# Altium PCB EMG_MainBoard_Layout.PcbDoc (part 6 of 6)
Units mm, origin at the board's own origin, x right, y up, seen from the top; angles counter-clockwise.
Board outline 80 x 45 mm, 4 copper layers (L1 TOP, L2 GND, L3 POWER SIGNAL, L4 BOTTOM GND), stack 1.164 mm thick; 231 components, 136 nets, 808 pads, 288 vias.
Unrouted connection lines stored in the file: 570.
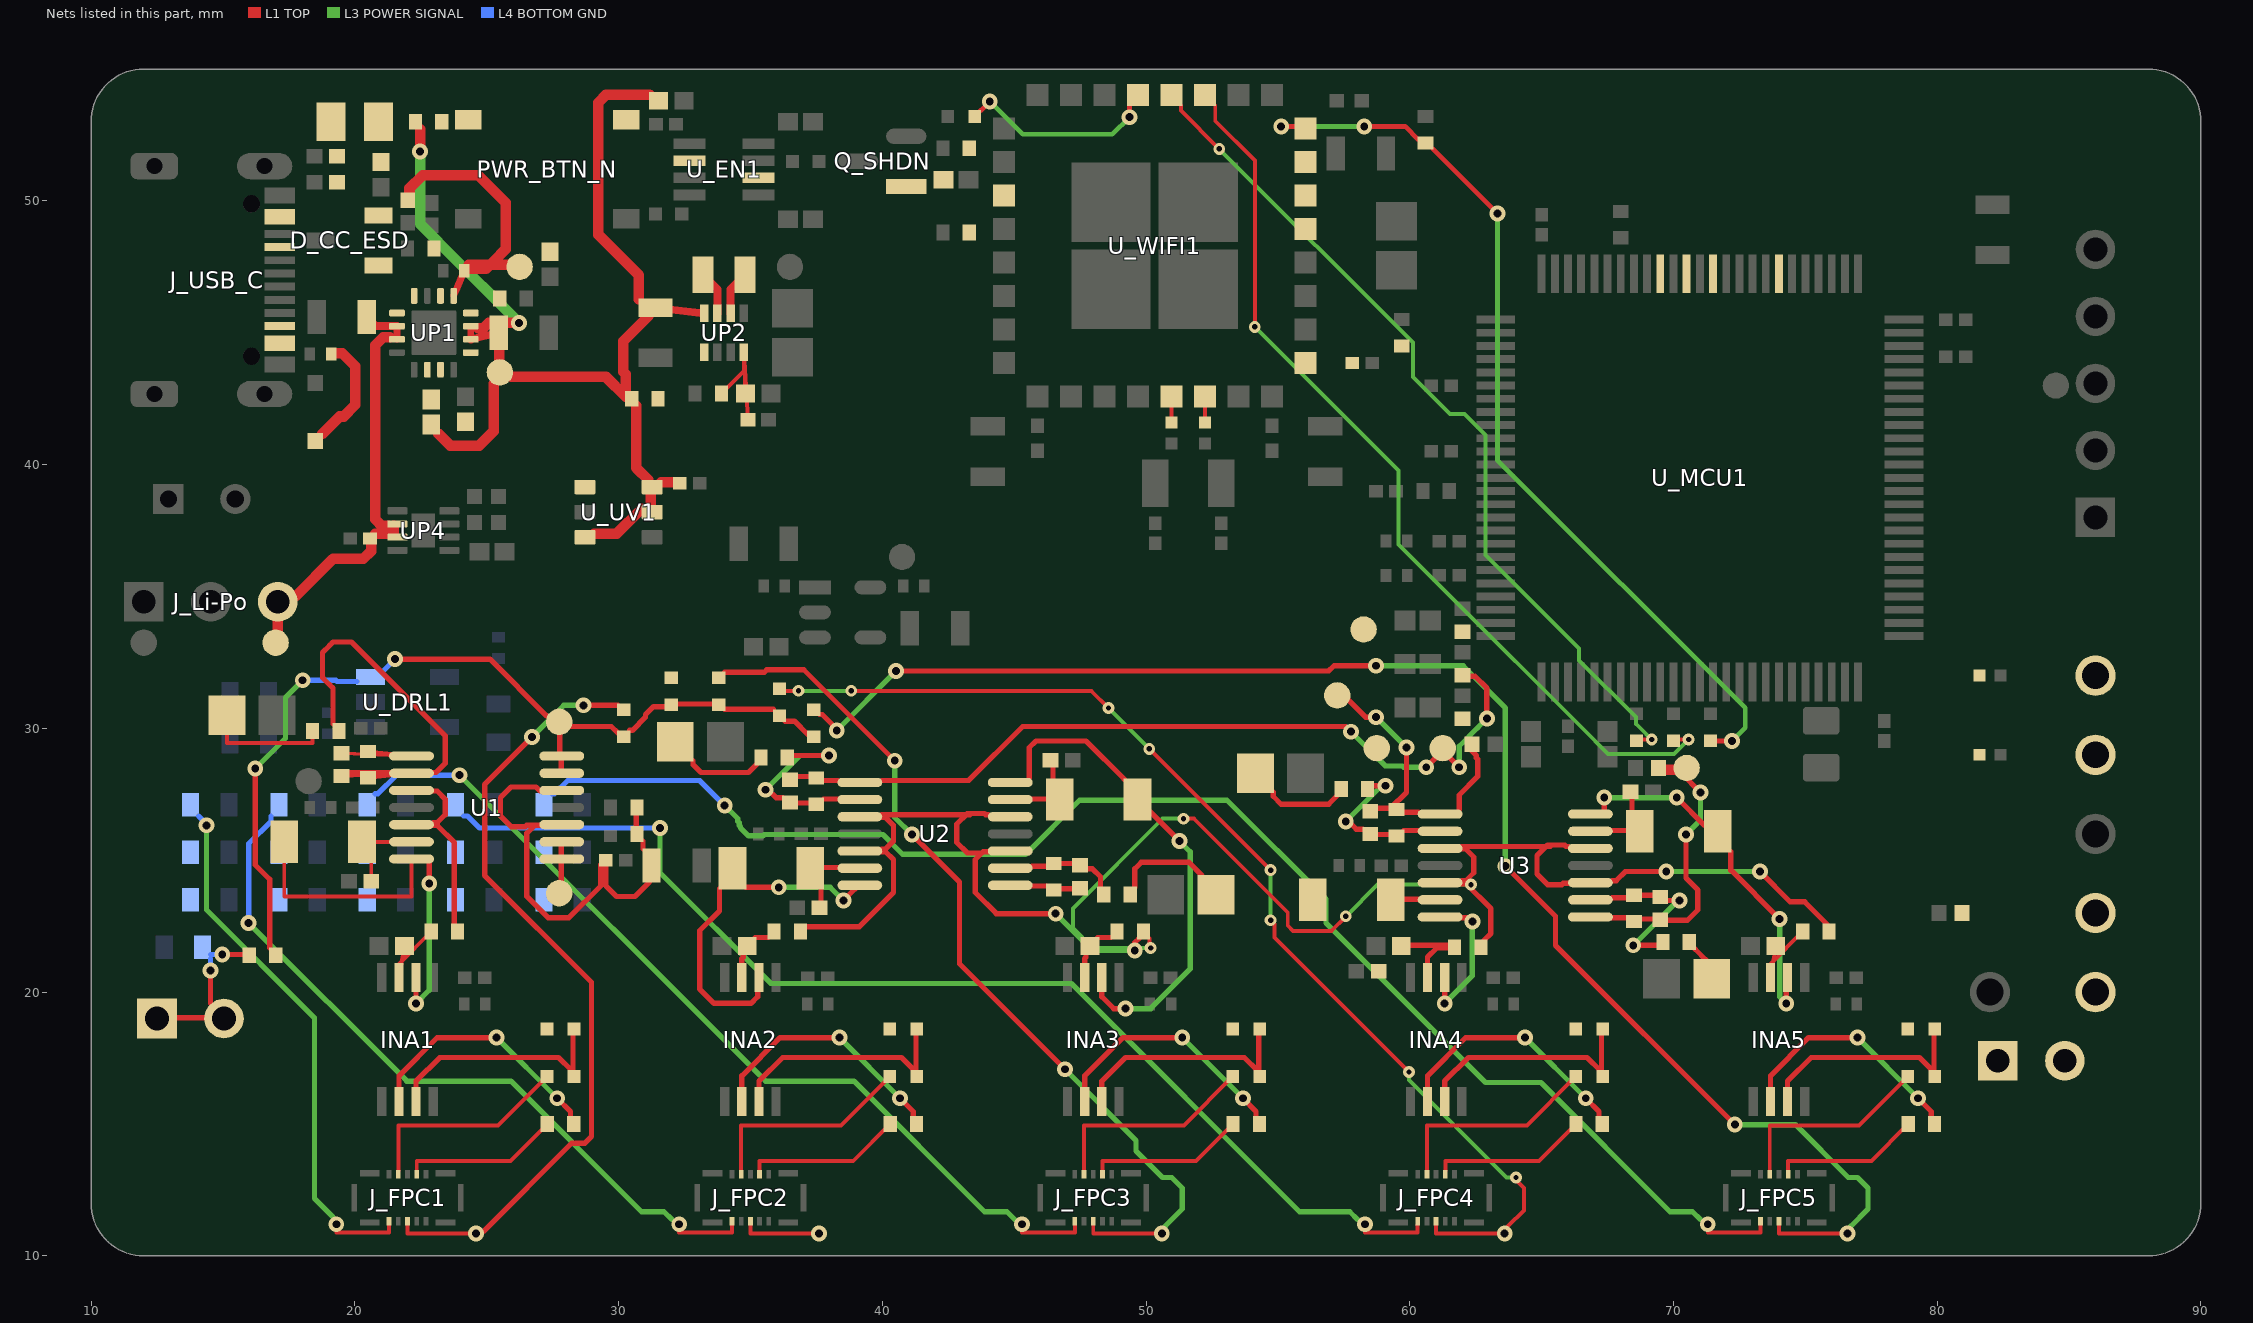
[diagram p6: the nets of this part, all layers, seen from the top]

## Via types
v1: diameter 0.6, hole 0.3, L1 TOP to L4 BOTTOM GND, 240 vias
v2: diameter 0.45, hole 0.2, L1 TOP to L4 BOTTOM GND, 31 vias
v3: diameter 0.6, hole 0.3, L1 TOP to L4 BOTTOM GND, tented both sides, 12 vias
v4: diameter 0.5, hole 0.3, L1 TOP to L4 BOTTOM GND, 5 vias

## Nets (pads, with @x,y where several pads share a name; then routed paths per layer and width w, separated by ;. In a path a pad name is that pad's centre, name@x,y a point inside that pad or via, vN(x,y) a via of type N, cw(c..) or ccw(c..) an arc to the next point about the centre after c; other vN are vias at no path point) (continued)
NetCH_1_2: CH_1.2 RG_1.1 RGN_1.2 U1.2 | length 18.3
  L1 TOP w0.15: CH_1.2@19.5,28.193 U1.2@22.15,28.3 RG_1.1@20.5,28.125
  L1 TOP w0.2: RGN_1.2@19.175,30.175 19.175,31.525 19.05,31.65 18.9,31.8 18.775,31.925 18.775,32.875 19.05,33.15 19.15,33.25 19.175,33.275 19.875,33.275 19.9,33.25 23.425,29.725 23.425,28.75 23.425,28.675 23.075,28.325 CH_1.2@19.775,28.325
NetCH_2_2: CH_2.2 RG_2.1 RGN_2.2 U2.2 | length 6.1
  L1 TOP w0.2: v1(35.575,27.675) 35.675,27.675 35.975,27.375 CH_2.2@36.225,27.375 ; RGN_2.2@36.625,28.975 v1(37.975,28.975) ; CH_2.2@36.775,27.175 RG_2.1@37.225,27.175 ; RG_2.1@37.775,27.325 U2.2@38.325,27.325
  L3 POWER SIGNAL w0.2: v1(35.575,27.675) 36.875,28.975 v1(37.975,28.975)
NetCH_3_2: CH_3.2 RG_3.1 RGN_3.2 U2.9 | length 2
  L1 TOP w0.2: U2.9@45.675,24.775 RG_3.1@46.225,24.775 ; RG_3.1@46.775,24.875 CH_3.2@47.225,24.875 ; CH_3.2@47.775,24.675 47.975,24.675 48.275,24.375 RGN_3.2@48.275,23.975
NetCH_4_2: CH_4.2 RG_4.1 RGN_4.2 U3.2 | length 4.3
  L1 TOP w0.2: v1(57.575,26.475) 57.675,26.475 57.975,26.175 CH_4.2@58.225,26.175 ; RGN_4.2@58.625,27.825 v1(59.075,27.825) ; CH_4.2@58.775,25.975 RG_4.1@59.225,25.975 ; RG_4.1@59.775,26.125 U3.2@60.325,26.125
  L3 POWER SIGNAL w0.2: v1(57.575,26.475) 58.925,27.825 v1(59.075,27.825)
NetCH_5_2: CH_5.2 RG_5.1 RGN_5.2 U3.9 | length 4.8
  L1 TOP w0.2: U3.9@67.675,23.575 RG_5.1@68.225,23.575 ; v1(68.475,21.775) RGN_5.2@69.375,21.775 ; RG_5.1@68.775,23.675 CH_5.2@69.225,23.675 ; CH_5.2@69.775,23.475 v1(70.225,23.475)
  L3 POWER SIGNAL w0.2: v1(68.475,21.775) 70.175,23.475 v1(70.225,23.475)
NetCL_1_1: CL_1.1 RGN_1.1 | length 4.7
  L1 TOP w0.15: CL_1.1@15.15,30.5 15.15,29.45 18.4,29.45 RGN_1.1@18.4,29.9
NetCL_2_1: CL_2.1 RGN_2.1 | length 2.8
  L1 TOP w0.2: CL_2.1@32.825,28.775 32.825,28.625 33.125,28.325 34.925,28.325 RGN_2.1@35.225,28.625
NetCL_3_1: CL_3.1 RGN_3.1 | length 3.6
  L1 TOP w0.2: RGN_3.1@49.575,23.975 49.575,24.675 49.825,24.925 51.625,24.925 CL_3.1@52.125,24.425
NetCL_4_1: CL_4.1 RGN_4.1 | length 2.8
  L1 TOP w0.2: CL_4.1@54.825,27.575 54.825,27.425 55.125,27.125 56.925,27.125 RGN_4.1@57.225,27.425
NetCL_5_1: CL_5.1 RGN_5.1 | length 0.6
  L1 TOP w0.2: RGN_5.1@70.825,21.625 CL_5.1@71.225,21.225
NetCservo_1_1: Cservo_1.1 Rservo_1.1 U1.6 | length 4.9
  L1 TOP w0.15: Cservo_1.1@20.275,25.7 U1.6@22.15,25.7 20.625,25.7 Rservo_1.1@20.625,24.2
NetCservo_2_1: Cservo_2.1 Rservo_2.1 U2.6 | length 1
  L1 TOP w0.2: 37.675,23.475 Cservo_2.1@37.675,23.925 ; Cservo_2.1@37.775,24.725 U2.6@38.325,24.725
NetCservo_3_1: Cservo_3.1 Rservo_3.1 U2.13 | length 1.1
  L1 TOP w0.2: U2.13@45.675,27.325 Cservo_3.1@46.225,27.325 ; Cservo_3.1@46.475,28.075 Rservo_3.1@46.475,28.575
NetCservo_4_1: Cservo_4.1 Rservo_4.1 U3.6 | length 0.5
  L1 TOP w0.2: Cservo_4.1@59.775,23.525 U3.6@60.325,23.525
NetCservo_5_1: Cservo_5.1 Rservo_5.1 U3.13 | length 1
  L1 TOP w0.2: U3.13@67.675,26.125 Cservo_5.1@68.225,26.125 ; Cservo_5.1@68.425,26.875 Rservo_5.1@68.425,27.375
NetCUP4_FB_1: CUP4_FB.1 RUP_3.1 RUP_4.2 UP2.8 | length 6.1
  L1 TOP w0.15: RUP_4.2@33.9,42.7 34.75,43.55 UP2.8@34.75,44.265 ; RUP_3.1@34.821,42.7 UP2.8@34.75,44.265 ; CUP4_FB.1@34.91,41.7 UP2.8@34.75,44.265
NetD_CC_ESD_1: D_CC_ESD.1 J_USB_C.A5 RJ1.2
NetD_CC_ESD_2: D_CC_ESD.2 J_USB_C.B5 RJ2.2
NetINA1_2: INA1.2 RDD2.2 | length 8.9
  L1 TOP w0.2: INA1.2@21.675,16.375 21.675,16.825 23.125,18.275 v1(25.375,18.275) ; v1(27.675,15.975) 28.175,15.475 RDD2.2@28.175,15.275
  L3 POWER SIGNAL w0.2: v1(25.375,18.275) v1(27.675,15.975)
NetINA1_3: INA1.3 RDD1.2 RDD3.2 | length 8.1
  L1 TOP w0.2: INA1.3@22.325,16.375 22.325,16.625 23.225,17.525 27.725,17.525 RDD1.2@28.225,17.025 ; RDD1.2@28.275,17.025 RDD3.2@28.275,18.375
NetINA1_7: INA1.7 RH_1.2 RL_1.1 | length 3.5
  L1 TOP w0.15: RH_1.2@21.879,21.75 INA1.7@21.675,20.55 21.675,21.075 RL_1.1@22.9,22.3
NetINA2_2: INA2.2 RDD5.2 | length 8.9
  L1 TOP w0.2: INA2.2@34.675,16.375 34.675,16.825 36.125,18.275 v1(38.375,18.275) ; v1(40.675,15.975) 41.175,15.475 RDD5.2@41.175,15.275
  L3 POWER SIGNAL w0.2: v1(38.375,18.275) v1(40.675,15.975)
NetINA2_3: INA2.3 RDD4.2 RDD6.2 | length 8.1
  L1 TOP w0.2: INA2.3@35.325,16.375 35.325,16.625 36.225,17.525 40.725,17.525 RDD4.2@41.225,17.025 ; RDD4.2@41.275,17.025 RDD6.2@41.275,18.375
NetINA2_7: INA2.7 RH_2.2 RL_2.1 | length 0.9
  L1 TOP w0.2: INA2.7@34.675,21.075 34.675,21.275 34.725,21.325 RH_2.2@34.725,21.475 ; RH_2.2@35.175,22.075 RL_2.1@35.675,22.075
NetINA3_2: INA3.2 RDD8.2 | length 8.9
  L1 TOP w0.2: INA3.2@47.675,16.375 47.675,16.825 49.125,18.275 v1(51.375,18.275) ; v1(53.675,15.975) 54.175,15.475 RDD8.2@54.175,15.275
  L3 POWER SIGNAL w0.2: v1(51.375,18.275) v1(53.675,15.975)
NetINA3_3: INA3.3 RDD7.2 RDD9.2 | length 8.1
  L1 TOP w0.2: INA3.3@48.325,16.375 48.325,16.625 49.225,17.525 53.725,17.525 RDD7.2@54.225,17.025 ; RDD7.2@54.275,17.025 RDD9.2@54.275,18.375
NetINA3_7: INA3.7 RH_3.2 RL_3.1 | length 0.9
  L1 TOP w0.2: INA3.7@47.675,21.075 47.675,21.275 47.725,21.325 RH_3.2@47.725,21.475 ; RH_3.2@48.175,22.075 RL_3.1@48.675,22.075
NetINA4_2: INA4.2 RDD11.2 | length 8.9
  L1 TOP w0.2: INA4.2@60.675,16.375 60.675,16.825 62.125,18.275 v1(64.375,18.275) ; v1(66.675,15.975) 67.175,15.475 RDD11.2@67.175,15.275
  L3 POWER SIGNAL w0.2: v1(64.375,18.275) v1(66.675,15.975)
NetINA4_3: INA4.3 RDD10.2 RDD12.2 | length 8.1
  L1 TOP w0.2: INA4.3@61.325,16.375 61.325,16.625 62.225,17.525 66.725,17.525 RDD10.2@67.225,17.025 ; RDD10.2@67.275,17.025 RDD12.2@67.275,18.375
NetINA4_7: INA4.7 RH_4.2 RL_4.1 | length 2.7
  L1 TOP w0.2: RH_4.2@59.975,21.775 RL_4.1@61.475,21.775 ; INA4.7@60.675,21.075 60.675,21.325 61.025,21.675 RL_4.1@61.475,21.675
NetINA5_2: INA5.2 RDD14.2 | length 8.5
  L1 TOP w0.2: INA5.2@73.675,16.375 73.675,16.825 75.125,18.275 v1(76.975,18.275) ; v1(79.275,15.975) 79.775,15.475 RDD14.2@79.775,15.275
  L3 POWER SIGNAL w0.2: v1(76.975,18.275) v1(79.275,15.975)
NetINA5_3: INA5.3 RDD13.2 RDD15.2 | length 7.7
  L1 TOP w0.2: INA5.3@74.325,16.375 74.325,16.625 75.225,17.525 79.325,17.525 RDD13.2@79.825,17.025 ; RDD13.2@79.875,17.025 RDD15.2@79.875,18.375
NetINA5_7: INA5.7 RH_5.2 RL_5.1 | length 3.5
  L1 TOP w0.15: RH_5.2@73.879,21.75 INA5.7@73.675,20.55 73.675,21.075 RL_5.1@74.9,22.3
NetJ_FPC1_8: J_FPC1.8 R_VREF1.2 | length 29.8
  L1 TOP w0.15: J_FPC1.8@22,11.17 22,10.85 v1(24.6,10.85)
  L1 TOP w0.2: v1@24.875,10.925 28.225,14.275 28.725,14.275 28.975,14.525 28.975,20.375 24.925,24.425 24.925,27.875 v1(26.725,29.675) ; v1(28.675,30.875) R_VREF1.2@29.975,30.875
  L3 POWER SIGNAL w0.2: v1(26.725,29.675) 27.925,30.875 v1(28.675,30.875)
NetJ_FPC2_8: J_FPC2.8 R_VREF2.2 | length 2.9
  L1 TOP w0.15: J_FPC2.8@35,11.17 35,10.85 v1(37.6,10.85)
NetJ_FPC3_8: J_FPC3.8 R_VREF3.2 | length 33.5
  L1 TOP w0.15: J_FPC3.8@48,11.17 48,10.85 v1(50.6,10.85)
  L1 TOP w0.2: R_VREF3.2@34.025,32.125 35.525,32.125 35.625,32.225 37.025,32.225 v1(40.475,28.775) ; v1(41.125,25.975) 42.925,24.175 42.925,21.075 v1(46.925,17.075)
  L3 POWER SIGNAL w0.2: v1(40.475,28.775) 40.475,26.625 v1(41.125,25.975) ; v1(46.925,17.075) 49.625,14.375 49.625,13.975 50.625,12.975 50.975,12.975 51.375,12.575 51.375,11.775 50.725,11.125
NetJ_FPC4_8: J_FPC4.8 R_VREF4.2 | length 42.1
  L1 TOP w0.15: R_VREF4.2@36.325,31.425 v2(36.825,31.425) ; v2(38.825,31.425) 47.925,31.425 v2(48.575,30.775) ; v2(50.125,29.225) v2(54.725,24.625) ; v2(54.725,22.725) 54.875,22.575 54.875,22.075 v2(59.975,16.975) ; J_FPC4.8@61,11.17 61,10.85 v1(63.6,10.85) ; 63.725,11.125 64.325,11.725 64.325,12.575 64.025,12.875 v2(64.025,12.975)
  L3 POWER SIGNAL w0.15: v2(36.825,31.425) v2(38.825,31.425) ; v2(48.575,30.775) v2(50.125,29.225) ; v2(54.725,22.725) v2(54.725,24.625) ; v2(59.975,16.975) 59.975,16.675 63.675,12.975 v2(64.025,12.975)
NetJ_FPC5_8: J_FPC5.8 R_VREF5.2 | length 58
  L1 TOP w0.15: J_FPC5.8@74,11.17 74,10.85 v1(76.6,10.85)
  L1 TOP w0.2: R_VREF5.2@37.625,30.525 37.725,30.525 38.275,29.975 v1(38.275,29.925) ; v1(40.525,32.175) 56.925,32.175 57.125,32.375 v1(58.725,32.375) ; v1(63.625,24.775) 65.525,22.875 65.525,21.775 v1(72.325,14.975)
  L3 POWER SIGNAL w0.2: v1(38.275,29.925) v1(40.525,32.175) ; v1(58.725,32.375) 61.524,32.375 62.025,32.375 63.625,30.775 63.625,30.024 v1(63.625,24.775) ; v1(72.325,14.975) 74.625,14.975 76.625,12.975 76.975,12.975 77.375,12.575 77.375,11.775 76.725,11.125
NetJ_REF_1: J_REF.1 J_REF.2 R_DRL_SEL.2 R_ref.1 | length 4
  L1 TOP w0.2: J_REF.1@13.225,19.025 J_REF.2@14.325,19.025 ; 14.525,19.575 v1(14.525,20.825) ; v1(14.975,21.425) R_ref.1@15.775,21.425
  L4 BOTTOM GND w0.2: v1(14.525,20.825) R_DRL_SEL.2@14.525,21.275 ; R_DRL_SEL.2@14.525,21.425 v1(14.975,21.425)
NetJP_WIFI_BOOT_1: JP_WIFI_BOOT.1 R_WIFI_BOOT_OVR.2
NetL1_1: L1.1 UP2.3 | length 1.7
  L1 TOP w0.3: L1.1@33.2,47.2 33.75,46.65 UP2.3@33.75,45.735
NetL1_2: L1.2 UP2.2 | length 1.7
  L1 TOP w0.3: UP2.2@34.25,45.735 34.25,46.65 L1.2@34.8,47.2
NetLED_CHG_A: LED_CHG.A R_CHG_LED.2
NetLED_CHG_C: LED_CHG.C UP1.9
NetPWR_BTN_N_A: PWR_BTN_N.A PWR_BTN_N.B U_EN1.2
NetQ_SHDN_1: Q_SHDN.1 R_SHDN_G.1 R_SHDN_PD.2
NetR_EN1_BIAS_2: R_EN1_BIAS.2 UP1.6
NetR_LIM_2: R_LIM.2 UP1.12
NetR_TMR_2: R_TMR.2 UP1.14
NetRISET_1: RISET.1 UP1.16
SYS_EN: R_EN.2 U_EN1.6 U_UV1.1 UP2.5
TS: R_TS_SER.2 UP1.1
USB_PGOOD_N: R_PGOOD.1 U_MCU1.82 UP1.7
Va_1: J_FPC1.2 R_DRL_VA1.1 RDD1.1 | length 8.1
  L1 TOP w0.15: J_FPC1.2@21.65,13.23 21.65,14.95 25,14.95 25.438,14.95 RDD1.1@27.288,16.8
Va_2: J_FPC2.2 R_DRL_VA2.1 RDD4.1 | length 8.1
  L1 TOP w0.15: J_FPC2.2@34.65,13.23 34.65,14.95 38,14.95 38.438,14.95 RDD4.1@40.288,16.8
Va_3: J_FPC3.2 R_DRL_VA3.1 RDD7.1 | length 8.1
  L1 TOP w0.15: J_FPC3.2@47.65,13.23 47.65,14.95 51,14.95 51.438,14.95 RDD7.1@53.288,16.8
Va_4: J_FPC4.2 R_DRL_VA4.1 RDD10.1 | length 8.1
  L1 TOP w0.15: J_FPC4.2@60.65,13.23 60.65,14.95 64,14.95 64.438,14.95 RDD10.1@66.288,16.8
Va_5: J_FPC5.2 R_DRL_VA5.1 RDD13.1 | length 7.7
  L1 TOP w0.15: J_FPC5.2@73.65,13.23 73.65,14.95 77,14.95 77.038,14.95 RDD13.1@78.888,16.8
Vb_1: J_FPC1.4 R_DRL_VB1.1 RDD2.1 | length 5.9
  L1 TOP w0.15: J_FPC1.4@22.35,13.23 22.35,13.6 25,13.6 25.9,13.6 RDD2.1@27.3,15
Vb_2: J_FPC2.4 R_DRL_VB2.1 RDD5.1 | length 5.9
  L1 TOP w0.15: J_FPC2.4@35.35,13.23 35.35,13.6 38,13.6 38.9,13.6 RDD5.1@40.3,15
Vb_3: J_FPC3.4 R_DRL_VB3.1 RDD8.1 | length 5.9
  L1 TOP w0.15: J_FPC3.4@48.35,13.23 48.35,13.6 51,13.6 51.9,13.6 RDD8.1@53.3,15
Vb_4: J_FPC4.4 R_DRL_VB4.1 RDD11.1 | length 5.9
  L1 TOP w0.15: J_FPC4.4@61.35,13.23 61.35,13.6 64,13.6 64.9,13.6 RDD11.1@66.3,15
Vb_5: J_FPC5.4 R_DRL_VB5.1 RDD14.1 | length 5.5
  L1 TOP w0.15: J_FPC5.4@74.35,13.23 74.35,13.6 77,13.6 77.5,13.6 RDD14.1@78.9,15
VBAT_CELL: C_BAT.1 CU6_1.2 J_Li-Po.3 pad.TP_VBAT_CELL UP1.2 UP1.3 UP4.2 UP4.3 | length 14.7
  L1 TOP w0.25: UP1.3@21.6,44.75 UP1.2@21.6,45.25
  L1 TOP w0.3: C_BAT.1@20.45,45.6 20.8,45.25 UP1.2@21.6,45.25
  L1 TOP w0.4: pad.TP_VBAT_CELL@17.075,33.725 J_Li-Po.3@17.075,34.075 ; J_Li-Po.3@17.775,35.025 19.175,36.425 20.235,36.425 20.325,36.425 20.625,36.725 CU6_1.2@20.625,37.025 ; CU6_1.2@20.775,37.375 UP4.3@21.275,37.375 ; UP4.2@21.275,37.675 21.025,37.675 20.775,37.925 20.775,39.385 20.775,42.3 20.775,44.525 21.075,44.825 UP1.3@21.325,44.825 ; UP4.3@21.475,37.375 UP4.2@21.475,37.675
VBUS: C_IN_.1 C_VBUS.2 D_VBUS.1 J_USB_C.A4_B9 J_USB_C.B4_A9 pad.TP_VBUS R_TS_TOP.2 UP1.13 | length 14.5
  L1 TOP w0.25: UP1.13@23.75,46.4 23.883,46.717 24.017,47.033 C_IN_.1@24.15,47.35
  L1 TOP w0.4: D_VBUS.1@18.775,41.175 19.425,41.825 19.575,41.825 20.025,42.275 20.025,43.725 19.525,44.225 C_VBUS.2@19.275,44.225 ; 22.075,50.325 22.075,50.475 22.575,50.975 24.675,50.975 25.725,49.925 25.725,48.175 25.25,47.7 24.975,47.425 C_IN_.1@24.325,47.425 ; C_IN_.1@24.325,47.575 25.7,47.575 pad.TP_VBUS@25.775,47.575
Vc_1: J_FPC1.6 R_DRL_VC1.1 RDD3.1 | length 19.9
  L1 TOP w0.15: v1(19.3,11.2) 19.3,10.88 21.3,10.88 J_FPC1.6@21.3,11.17
  L3 POWER SIGNAL w0.2: v1(14.375,26.325) 14.375,23.125 18.475,19.025 18.475,12.175 19.175,11.475
  L4 BOTTOM GND w0.2: R_DRL_VC1.1@14.075,26.675 14.375,26.375 v1(14.375,26.325)
Vc_2: J_FPC2.6 R_DRL_VC2.1 RDD6.1 | length 27.7
  L1 TOP w0.15: v1(32.3,11.2) 32.3,10.88 34.3,10.88 J_FPC2.6@34.3,11.17
  L3 POWER SIGNAL w0.2: v1(15.975,22.625) 21.975,16.625 25.925,16.625 30.875,11.675 31.725,11.675 32.025,11.375
  L4 BOTTOM GND w0.2: v1(15.975,22.625) 15.975,25.625 16.825,26.475 R_DRL_VC2.1@16.825,26.675
Vc_3: J_FPC3.6 R_DRL_VC3.1 RDD9.1 | length 34.1
  L1 TOP w0.15: v1(45.3,11.2) 45.3,10.88 47.3,10.88 J_FPC3.6@47.3,11.17
  L3 POWER SIGNAL w0.2: v1(23.975,28.225) 35.575,16.625 38.925,16.625 43.875,11.675 44.725,11.675 45.025,11.375
  L4 BOTTOM GND w0.2: R_DRL_VC3.1@20.775,27.525 20.875,27.525 21.575,28.225 v1(23.975,28.225)
Vc_4: J_FPC4.6 R_DRL_VC4.1 RDD12.1 | length 43.8
  L1 TOP w0.15: v1(58.3,11.2) 58.3,10.88 60.3,10.88 J_FPC4.6@60.3,11.17
  L3 POWER SIGNAL w0.2: v1(31.575,26.225) 31.575,24.525 35.775,20.325 47.175,20.325 55.825,11.675 57.725,11.675 58.025,11.375
  L4 BOTTOM GND w0.2: R_DRL_VC4.1@24.125,26.675 24.275,26.675 24.725,26.225 v1(31.575,26.225)
Vc_5: J_FPC5.6 R_DRL_VC5.1 RDD15.1 | length 55.7
  L1 TOP w0.15: v1(71.3,11.2) 71.3,10.88 73.3,10.88 J_FPC5.6@73.3,11.17
  L3 POWER SIGNAL w0.2: v1(34.025,27.075) 34.525,26.575 34.525,26.475 34.575,26.425 34.575,26.325 34.625,26.275 34.625,26.225 34.925,25.925 35.475,25.925 35.525,25.975 40.025,25.975 40.775,25.225 45.425,25.225 47.475,27.275 53.075,27.275 56.825,23.525 56.825,22.625 62.875,16.575 64.975,16.575 69.875,11.675 70.725,11.675 71.025,11.375
  L4 BOTTOM GND w0.2: R_DRL_VC5.1@27.475,27.525 27.575,27.525 28.075,28.025 33.075,28.025 v1(34.025,27.075)
VDiv: Cdiv_1.2 Cdiv_10uF.2 RV1.1 RV2.2 U1.10 U1.12 | length 15.2
  L1 TOP w0.2: U1.12@27.025,27.625 26.875,27.775 25.925,27.775 25.525,27.375 25.525,26.675 25.925,26.275 26.475,26.275 26.525,26.325 27.025,26.325 26.825,26.325 26.525,26.025 26.525,23.625 27.325,22.825 28.125,22.825 29.325,24.025 Cdiv_1.2@29.325,24.825 ; Cdiv_1.2@29.525,24.825 29.525,24.025 29.925,23.625 30.625,23.625 Cdiv_10uF.2@31.175,24.175 ; RV1.1@30.675,26.275 RV2.2@30.675,26.725 ; Cdiv_10uF.2@30.925,25.425 RV1.1@30.925,25.725
VOUT_1: CH_1.1 pad.TP_VOUT_1 R_ADC1.1 RG_1.2 U1.1 | length 4.3
  L1 TOP w0.15: CH_1.1@19.5,29.057 U1.1@22.15,28.95 RG_1.2@20.5,29.125
VOUT_2: CH_2.1 pad.TP_VOUT_2 R_ADC2.1 RG_2.2 U2.1 | length 28.4
  L1 TOP w0.2: CH_2.1@36.775,28.175 RG_2.2@37.225,28.175 ; RG_2.2@37.775,28.025 U2.1@38.325,28.025 ; U2.1@39.975,28.025 43.275,28.025 45.325,30.075 57.575,30.075 v1(57.775,29.875) ; v1(60.625,28.525) pad.TP_VOUT_2@60.975,28.875 ; pad.TP_VOUT_2@61.525,28.875 v1(61.875,28.525) ; R_ADC2.1@62.275,31.975 62.475,31.975 62.925,31.525 v1(62.925,30.375)
  L3 POWER SIGNAL w0.2: v1(57.775,29.875) 59.075,28.575 59.725,28.575 59.775,28.525 v1(60.625,28.525) ; v1(61.875,28.525) 61.875,29.325 62.575,30.024 v1(62.925,30.375)
VOUT_3: CH_3.1 pad.TP_VOUT_3 R_ADC3.1 RG_3.2 U2.8 | length 1
  L1 TOP w0.2: U2.8@45.675,24.025 RG_3.2@46.225,24.025 ; RG_3.2@46.775,23.925 CH_3.1@47.225,23.925
VOUT_4: CH_4.1 pad.TP_VOUT_4 R_ADC4.1 RG_4.2 U3.1 | length 9.6
  L1 TOP w0.2: pad.TP_VOUT_4@57.675,31.075 58.325,30.425 v1(58.725,30.425) ; RG_4.2@59.225,26.975 58.775,26.975 59.275,26.975 59.875,27.575 v1(59.875,29.275) ; RG_4.2@59.775,26.825 U3.1@60.325,26.825 ; 61.875,26.925 61.875,27.475 62.575,28.175 62.575,28.825 62.525,28.875 62.525,28.975 R_ADC4.1@62.375,29.125
  L3 POWER SIGNAL w0.2: v1(58.725,30.425) v1(59.875,29.275)
VOUT_5: CH_5.1 pad.TP_VOUT_5 R_ADC5.1 RG_5.2 U3.8 | length 9.2
  L1 TOP w0.2: U3.8@67.675,22.825 RG_5.2@68.225,22.825 ; RG_5.2@68.775,22.775 CH_5.1@69.225,22.775 ; R_ADC5.1@69.675,28.325 70.275,28.325 v1(71.025,27.575) ; R_ADC5.1@69.675,28.525 pad.TP_VOUT_5@70.025,28.525 ; CH_5.1@69.775,22.725 70.525,22.725 70.925,23.125 70.925,23.875 70.475,24.325 v1(70.475,25.975)
  L3 POWER SIGNAL w0.2: v1(70.475,25.975) 71.025,26.525 v1(71.025,27.575)
VREF_A: pad.TP_VREF_A RL_1.2 RL_2.2 RL_3.2 RL_4.2 RL_5.2 U1.3 U1.5 U1.8 U1.9 U2.3 U2.5 U2.10 U2.12 U3.3 U3.5 U3.10 U3.12 | length 76.6
  L1 TOP w0.15: RL_3.2@50.125,22.025 50.125,21.725 v2(50.175,21.675) ; v2(51.425,26.575) 51.825,26.575 55.375,23.025 55.375,22.525 55.575,22.325 57.025,22.325 v2(57.575,22.875) ; U3.5@61.925,24.075 v2(62.325,24.075)
  L1 TOP w0.2: U1.5@22.975,26.325 23.125,26.325 23.775,25.675 RL_1.2@23.775,22.575 ; U1.5@22.975,26.425 23.125,26.425 23.425,26.725 23.425,27.325 23.125,27.625 U1.3@22.975,27.625 ; pad.TP_VREF_A@27.825,24.225 U1.8@27.825,24.925 ; U1.8@27.825,25.225 U1.9@27.825,25.575 ; RL_2.2@37.125,22.475 39.125,22.475 40.425,23.775 40.425,25.025 40.125,25.325 U2.5@39.975,25.325 ; U2.5@39.975,25.425 40.125,25.425 40.425,25.725 40.425,26.325 40.125,26.625 U2.3@39.975,26.625 ; U2.3@39.975,26.725 43.325,26.725 43.375,26.775 43.875,26.775 ; v1(46.575,22.975) 44.325,22.975 43.525,23.775 43.525,25.025 43.825,25.325 ; v1(49.575,21.575) 49.575,21.875 RL_3.2@49.725,22.025 ; U3.5@61.975,24.125 62.125,24.125 63.075,23.175 63.075,22.225 RL_4.2@62.825,21.975 ; U3.5@61.975,24.225 62.125,24.225 62.425,24.525 62.425,25.125 62.125,25.425 U3.3@61.975,25.425 ; U3.3@61.975,25.525 65.325,25.525 65.375,25.575 65.875,25.575 ; U3.10@66.025,24.125 65.825,24.125 65.775,24.075 65.225,24.075 64.825,24.475 64.825,25.175 65.225,25.575 65.875,25.575 ; U3.10@67.675,24.225 67.825,24.225 68.175,24.575 v1(69.725,24.575) ; v1(73.275,24.575) 74.425,23.425 74.975,23.425 RL_5.2@75.825,22.575 ; 43.825,25.325 44.025,25.325 43.825,25.325 ; 43.825,25.325 43.775,25.275 43.225,25.275 42.825,25.675 42.825,26.375 43.225,26.775 43.875,26.775 ; 43.875,26.775 43.925,26.725 ; 43.875,26.775 43.925,26.725 ; 43.925,26.725 44.025,26.725 43.925,26.725 ; 65.875,25.575 65.925,25.525 ; 65.875,25.575 65.925,25.525 ; 65.925,25.525 66.025,25.525 65.925,25.525
  L3 POWER SIGNAL w0.15: v2(50.175,21.675) 47.975,21.675 47.225,22.425 47.225,23.175 50.625,26.575 v2(51.425,26.575) ; v2(57.575,22.875) 58.775,24.075 v2(62.325,24.075)
  L3 POWER SIGNAL w0.2: v1(46.575,22.975) 47.975,21.575 v1(49.575,21.575) ; v1(69.725,24.575) v1(73.275,24.575)
VREF_B_SRC: pad.TP_VREF_B_SRC R_ref.2 R_VREF1.1 R_VREF2.1 R_VREF3.1 R_VREF4.1 R_VREF5.1 U1.13 U1.14 U_DRL1.3 | length 29.3
  L1 TOP w0.2: v1(16.225,28.475) 16.225,24.825 16.775,24.275 R_ref.2@16.775,21.675 ; v1(21.525,32.625) 24.95,32.625 25.125,32.625 27.275,30.475 ; U1.14@27.775,29.125 pad.TP_VREF_B_SRC@27.775,29.775 ; 27.825,28.475 U1.14@27.825,28.825 ; pad.TP_VREF_B_SRC@28.175,30.075 29.725,30.075 R_VREF1.1@29.975,29.825 ; R_VREF1.1@30.425,29.925 30.525,29.925 31.025,30.425 31.025,30.525 31.325,30.825 R_VREF2.1@31.775,30.825 ; R_VREF2.1@32.225,30.925 R_VREF3.1@33.575,30.925 ; R_VREF3.1@34.025,30.725 R_VREF4.1@35.875,30.725 ; R_VREF4.1@36.325,30.275 36.675,30.275 R_VREF5.1@37.175,29.775
  L3 POWER SIGNAL w0.2: v1(16.225,28.475) 17.375,29.625 17.375,31.175 17.75,31.55 18,31.8 v1(18.025,31.825)
  L4 BOTTOM GND w0.2: v1(18.025,31.825) 19.05,31.825 19.275,31.825 19.3,31.8 19.325,31.775 U_DRL1.3@20.075,31.775 ; U_DRL1.3@21.125,32.225 v1(21.525,32.625)
Vservo_1: Cservo_1.2 INA1.6 U1.7 | length 14.3
  L1 TOP w0.15: Cservo_1.2@17.325,25.7 17.325,23.625 22.15,23.625 U1.7@22.15,25.05
  L1 TOP w0.2: v1(22.325,19.575) INA1.6@22.325,20.025 ; v1(22.825,24.125) U1.7@22.825,24.925
  L3 POWER SIGNAL w0.2: v1(22.325,19.575) 22.825,20.075 v1(22.825,24.125)
Vservo_2: Cservo_2.2 INA2.6 U2.7 | length 11.4
  L1 TOP w0.2: Cservo_2.2@33.825,23.925 33.825,23.075 33.075,22.325 33.075,20.125 33.625,19.575 35.025,19.575 35.275,19.825 INA2.6@35.275,20.025 ; Cservo_2.2@34.825,23.975 v1(36.075,23.975) ; v1(38.525,23.475) U2.7@38.975,23.925
  L3 POWER SIGNAL w0.2: v1(36.075,23.975) 38.025,23.975 v1(38.525,23.475)
Vservo_3: Cservo_3.2 INA3.6 U2.14 | length 16.4
  L1 TOP w0.2: 45.575,28.125 45.575,29.275 45.825,29.525 47.725,29.525 Cservo_3.2@49.175,28.075 ; INA3.6@48.325,20.025 48.325,19.825 48.775,19.375 v1(49.225,19.375) ; Cservo_3.2@50.175,26.825 v1(51.275,25.725)
  L3 POWER SIGNAL w0.2: v1(49.225,19.375) 50.175,19.375 51.675,20.875 51.675,25.325 v1(51.275,25.725)
Vservo_4: Cservo_4.2 INA4.6 U3.7 | length 4.4
  L1 TOP w0.2: v1(61.325,19.575) INA4.6@61.325,20.025 ; U3.7@61.975,22.825 62.225,22.825 v1(62.375,22.675)
  L3 POWER SIGNAL w0.2: v1(61.325,19.575) 62.375,20.625 v1(62.375,22.675)
Vservo_5: Cservo_5.2 INA5.6 U3.14 | length 11.8
  L1 TOP w0.2: U3.14@67.375,26.925 v1(67.375,27.375) ; v1(70.125,27.375) Cservo_5.2@71.175,26.325 ; Cservo_5.2@72.175,25.325 72.175,24.625 v1(74.025,22.775) ; v1(74.275,19.575) INA5.6@74.275,20.025
  L3 POWER SIGNAL w0.2: v1(67.375,27.375) v1(70.125,27.375) ; v1(74.025,22.775) 74.025,19.825 v1(74.275,19.575)
VSYS: C_OUT_.1 C_UV_BYPASS.1 CUP4_1.1 pad.TP_VSYS R_CHG_LED.1 R_EN1_1.1 R_EN1_BIAS.1 R_EN.1 U_UV1.3 U_UV1.5 U_UV1.6 UP1.10 UP1.11 UP2.4 | length 42.9
  L1 TOP w0.25: UP1.10@24.4,44.75 UP1.11@24.4,45.25
  L1 TOP w0.3: UP1.10@24.4,44.75 C_OUT_.1@25.45,45 ; CUP4_1.1@31.4,45.95 UP2.4@33.25,45.735
  L1 TOP w0.4: v1(22.475,51.875) R_CHG_LED.1@22.475,52.725 ; R_EN1_BIAS.1@23.175,41.175 23.625,40.725 24.725,40.725 25.275,41.275 25.275,42.3 pad.TP_VSYS@25.275,43.075 ; UP1.11@24.675,45.175 24.875,45.175 25.075,45.375 25.7,45.375 v1(26.225,45.375) ; pad.TP_VSYS@25.475,43.975 C_OUT_.1@25.475,44.375 ; pad.TP_VSYS@25.925,43.325 29.525,43.325 R_EN.1@30.275,42.575 ; U_UV1.3@29.075,37.375 29.925,37.375 U_UV1.5@30.875,38.325 ; R_EN.1@30.275,42.775 30.275,43.425 30.175,43.525 30.175,44.675 CUP4_1.1@31.125,45.625 ; R_EN.1@30.675,42.225 30.675,39.875 31.125,39.425 ; CUP4_1.1@30.775,46.275 30.775,47.175 29.225,48.725 29.225,53.725 29.525,54.025 R_EN1_1.1@31.175,54.025 ; 31.225,38.475 U_UV1.6@31.225,38.925 ; U_UV1.6@31.625,39.325 C_UV_BYPASS.1@32.075,39.325
  L3 POWER SIGNAL w0.4: v1(22.475,51.875) 22.475,49.125 23.9,47.7 25.7,45.9 v1(26.225,45.375)
WIFI_BOOT: JP_WIFI_BOOT.2 R_WIFI_BOOT_PD.2 TP_WIFI_BOOT.TP U_MCU1.91 U_WIFI1.3
WIFI_CHIP_EN: C_WIFI_EN.1 R_WIFI_EN_PD.1 TP_WIFI_CHIP_EN.TP U_MCU1.87 U_WIFI1.17
WIFI_SPI_CLK: R_SPI_SCK.1 U_WIFI1.28 | length 32.1
  L1 TOP w0.15: U_WIFI1.28@51.325,53.625 51.325,53.425 v2(52.775,51.975) ; R_SPI_SCK.1@68.825,29.575 v2(69.175,29.575)
  L3 POWER SIGNAL w0.15: v2(52.775,51.975) 60.125,44.625 60.125,43.325 61.524,41.925 ; 61.525,41.925 62.075,41.925 62.875,41.125 62.875,36.575 66.425,33.025 66.425,32.575 68.575,30.425 68.575,30.175 68.725,30.024 v2(69.175,29.575)
WIFI_SPI_CS: R_SPI_CS.1 R_WIFI_CS_PD.1 U_WIFI1.24 | length 34.1
  L1 TOP w0.18: v1(55.125,52.825) U_WIFI1.24@55.625,52.825 ; v1(58.275,52.825) 59.825,52.825 R_WIFI_CS_PD.1@60.325,52.325 ; R_WIFI_CS_PD.1@60.875,51.975 v1(63.325,49.525) ; R_SPI_CS.1@71.625,29.525 v1(72.225,29.525)
  L3 POWER SIGNAL w0.18: v1(55.125,52.825) v1(58.275,52.825) ; v1(63.325,49.525) 63.325,48.976 63.325,40.175 72.725,30.775 72.725,30.025 ; v1(72.225,29.525) 72.725,30.024
WIFI_SPI_MISO: R_SPI_MISO.1 U_WIFI1.29 | length 7
  L1 TOP w0.18: R_SPI_MISO.1@43.725,53.425 v1(44.075,53.775) ; v1(49.375,53.175) U_WIFI1.29@49.375,53.625
  L3 POWER SIGNAL w0.18: v1(44.075,53.775) 45.325,52.525 48.725,52.525 v1(49.375,53.175)
WIFI_SPI_MOSI: R_SPI_MOSI.1 U_WIFI1.27 | length 34.4
  L1 TOP w0.15: U_WIFI1.27@52.625,53.625 52.625,53.025 54.125,51.525 v2(54.125,45.225) ; R_SPI_MOSI.1@70.225,29.575 v2(70.575,29.575)
  L3 POWER SIGNAL w0.15: v2(54.125,45.225) 59.575,39.775 59.575,36.975 61.524,35.026 66.526,30.024 67.525,29.025 70.025,29.025 v2(70.575,29.575)
WIFI_SPI_RDY: U_MCU1.89 U_WIFI1.21
WIFI_UART_RX: R_WIFI_UART_TX_LINK.1 TP_WIFI_UART_RX.TP U_WIFI1.23
WIFI_UART_TX: R_WIFI_UART_RX_LINK.1 TP_WIFI_UART_TX.TP U_WIFI1.22
WIFI_X32_RAW_IN: R_WIFI_X32_IN.2 U_WIFI1.14 | length 1
  L1 TOP w0.15: R_WIFI_X32_IN.2@52.235,41.6 U_WIFI1.14@52.235,42.584
WIFI_X32_RAW_OUT: R_WIFI_X32_OUT.2 U_WIFI1.13 | length 1
  L1 TOP w0.15: R_WIFI_X32_OUT.2@50.965,41.6 U_WIFI1.13@50.965,42.584
pads on no net: J_USB_C. J_USB_C.A6 J_USB_C.A7 J_USB_C.A8 J_USB_C.B6 J_USB_C.B7 J_USB_C.B8 U_MCU1.1 U_MCU1.2 U_MCU1.3 U_MCU1.4 U_MCU1.5 U_MCU1.7 U_MCU1.8 U_MCU1.9 U_MCU1.12 U_MCU1.13 U_MCU1.15 U_MCU1.16 U_MCU1.17 U_MCU1.18 U_MCU1.33 U_MCU1.34 U_MCU1.36 U_MCU1.37 U_MCU1.38 U_MCU1.39 U_MCU1.40 U_MCU1.41 U_MCU1.42 U_MCU1.43 U_MCU1.44 U_MCU1.45 U_MCU1.46 U_MCU1.47 U_MCU1.51 U_MCU1.52 U_MCU1.53 U_MCU1.54 U_MCU1.55 U_MCU1.56 U_MCU1.57 U_MCU1.58 U_MCU1.59 U_MCU1.60 U_MCU1.61 U_MCU1.62 U_MCU1.63 U_MCU1.64 U_MCU1.65 U_MCU1.66 U_MCU1.67 U_MCU1.70 U_MCU1.71 U_MCU1.77 U_MCU1.78 U_MCU1.79 U_MCU1.80 U_MCU1.84 U_MCU1.88 U_MCU1.90 U_MCU1.92 U_MCU1.93 U_MCU1.97 U_MCU1.98 U_UV1.4 U_WIFI1.1 U_WIFI1.2 U_WIFI1.4 U_WIFI1.5 U_WIFI1.6 U_WIFI1.7 U_WIFI1.8 U_WIFI1.11 U_WIFI1.12 U_WIFI1.19 U_WIFI1.20 U_WIFI1.31 UP1.17@23,45 UP3.4

## Polygon pours and split planes (outlines as drawn)
GND on L2 GND "EMG_L2_COMMON_GND" (solid, remove dead copper, pour order 0): 12,10.5 88,10.5 ccw(c88,12) 89.5,12 89.5,53 ccw(c88,53) 88,54.5 12,54.5 ccw(c12,53) 10.5,53 10.5,12 ccw(c12,12)
GND on L4 BOTTOM GND "EMG_L4_COMMON_GND" (solid, remove dead copper, pour order 1): 12,10.5 88,10.5 ccw(c88,12) 89.5,12 89.5,53 ccw(c88,53) 88,54.5 12,54.5 ccw(c12,53) 10.5,53 10.5,12 ccw(c12,12)

## Keep-outs
Keep-Out Layer:
  region: 44.19,54.44 56.47,54.44 56.47,59.44 44.19,59.44

## Silkscreen, mask and mechanical layers (free items; w line width, h text height)
Mechanical 4:
  lines w0.08: 21.3,13.087 21.3,14.2 ; 22,6 22,11.1 ; 34.3,13.087 34.3,14.2 ; 35,6 35,11.1 ; 47.3,13.087 47.3,14.2 ; 48,6 48,11.1 ; 60.3,13.087 60.3,14.2 ; 61,6 61,11.1 ; 73.3,13.087 73.3,14.2 ; 74,6 74,11.1
  text "COMMON GND - NO AGND / DGND SPLIT" at 33,63 h0.65
  text "ANTENNA: NO COPPER / VIAS / METAL / BATTERY" at 32,61 h0.65
  text "REMOTE NTC: ONE 103AT-2 ON CELL; P1 GND / P2 BAT_TEMP" at 10,57 h0.65
  text "SWD 1 VTREF / 2 IO / 3 GND / 4 CLK / 5 NRST" at 92,42 h0.65
  text "SIG1" at 19.4,14.4 h0.65
  text "SIG1" at 32.4,14.4 h0.65
  text "SIG1" at 45.4,14.4 h0.65
  text "SIG1" at 58.4,14.4 h0.65
  text "SIG1" at 71.4,14.4 h0.65
  text "CH1 / MAIN END" at 19,8 h0.65
  text "CH2 / MAIN END" at 32,8 h0.65
  text "CH3 / MAIN END" at 45,8 h0.65
  text "CH4 / MAIN END" at 58,8 h0.65
  text "CH5 / MAIN END" at 71,8 h0.65
  text "FLEX FOLD / KEYING / TOOL ENVELOPES TBD - DO NOT REVERSE" at 14,4 h0.65
  text "TRIAL 80 x 45 mm / R2 - NOT FABRICATION RELEASE" at 31,2 h0.65
Top Assembly:
  drawing of 157 lines, arcs and shapes, not listed

## Text inside footprints (layer, text, board x,y; h text height)
J_USB_C: Top 3D Body "PCB EDGE" at 9.9,41.6 h0.41 r270